# Altium PCB PCB.PcbDoc (part 2 of 2)
Units mm, origin at the board's own origin, x right, y up, seen from the top; angles counter-clockwise.
Board outline 44.8 x 23.3 mm, 4 copper layers (Top Layer, GND, VDD, Bottom Layer), stack 1.192 mm thick; 40 components, 63 nets, 241 pads, 86 vias.
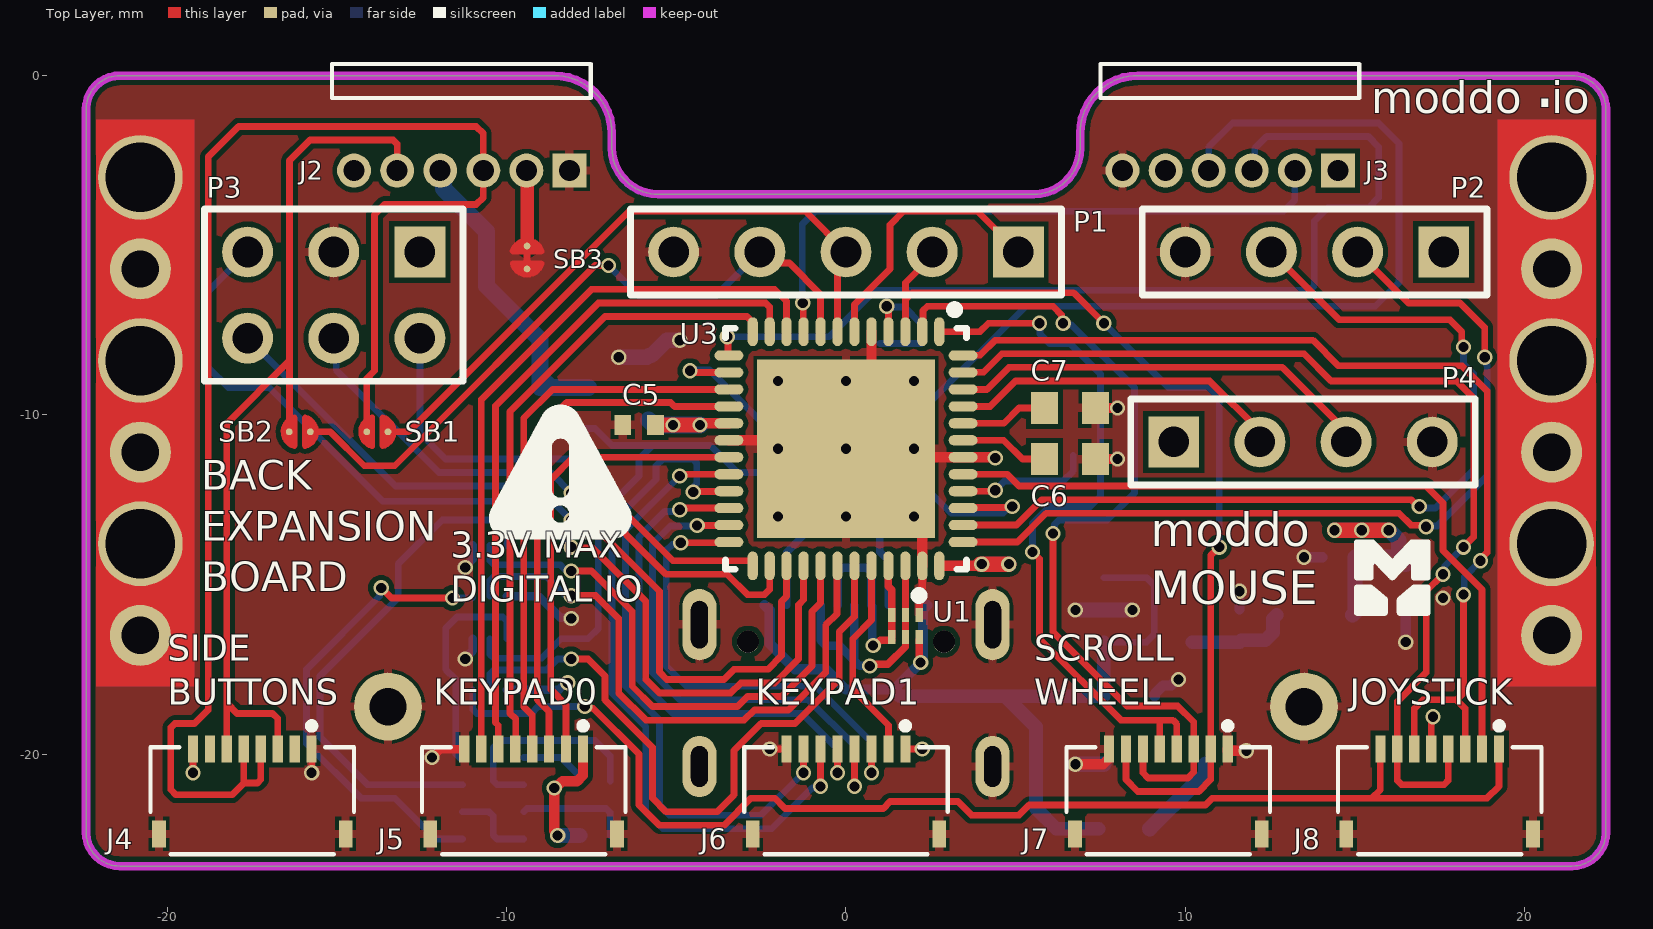
[diagram p0: Top Layer view]

## Part data (continued)
U3: "MCU 32-Bit SAM D21 ARM Cortex M0+ RISC 256KB Flash 3.3V 48-Pin QFN EP - Trays", Ambient Temperature Range High=85°C, Case/Package=QFN, Clock Frequency=48MHz, Manufacturer=Microchip, Manufacturer Lifecycle Status=REL, Max Junction Temperature (Tj)=100°C, Max Supply Voltage=3.63V, Min Operating Temperature=-40°C, Min Supply Voltage=1.62V, Operating Supply Voltage=3.3V, Category=Microcontrollers, ComponentLink1Description=https://datasheet.octopart.com:443/ATSAMD21G18A-MU-Microchip-datasheet-141002421.pdf?src-supplier=Geoflip, ComponentLink1URL=https://datasheet.octopart.com:443/ATSAMD21G18A-MU-Microchip-datasheet-141002421.pdf?src-supplier=Geoflip, ComponentLink2Description=https://sigma.octopart.com:443/141002422/technical_drawing/Microchip-ATSAMD21G18A-MU.pdf?src-supplier=Upverter, ComponentLink2URL=https://sigma.octopart.com:443/141002422/technical_drawing/Microchip-ATSAMD21G18A-MU.pdf?src-supplier=Upverter, ComponentLink3Description=https://datasheet.octopart.com:443/ATSAMD21G18A-MU-Atmel-datasheet-48569826.pdf?src-supplier=Upverter, ComponentLink3URL=https://datasheet.octopart.com:443/ATSAMD21G18A-MU-Atmel-datasheet-48569826.pdf?src-supplier=Upverter, ComponentLink4Description=https://datasheet.octopart.com:443/ATSAMD21G18A-MU-Microchip-datasheet-189045283.pdf?src-supplier=Microchip, ComponentLink4URL=https://datasheet.octopart.com:443/ATSAMD21G18A-MU-Microchip-datasheet-189045283.pdf?src-supplier=Microchip, ComponentLink5Description=https://datasheet.octopart.com:443/ATSAMD21G18A-MU-Microchip-datasheet-156012854.pdf?src-supplier=Microchip, ComponentLink5URL=https://datasheet.octopart.com:443/ATSAMD21G18A-MU-Microchip-datasheet-156012854.pdf?src-supplier=Microchip, ComponentLink6Description=https://datasheet.octopart.com:443/ATSAMD21G18A-MU-Microchip-datasheet-62316227.pdf?src-supplier=element14+APAC, ComponentLink6URL=https://datasheet.octopart.com:443/ATSAMD21G18A-MU-Microchip-datasheet-62316227.pdf?src-supplier=element14+APAC, ComponentLink7Description=https://datasheet.octopart.com:443/ATSAMD21G18A-MU-Atmel-datasheet-24968745.pdf?src-supplier=Farnell, ComponentLink7URL=https://datasheet.octopart.com:443/ATSAMD21G18A-MU-Atmel-datasheet-24968745.pdf?src-supplier=Farnell, ComponentLink8Description=https://datasheet.octopart.com:443/ATSAMD21G18A-MU-Microchip-datasheet-68295849.pdf?src-supplier=Electro+Sonic, ComponentLink8URL=https://datasheet.octopart.com:443/ATSAMD21G18A-MU-Microchip-datasheet-68295849.pdf?src-supplier=Electro+Sonic, ComponentLink9Description=https://datasheet.octopart.com:443/ATSAMD21G18A-MU-Microchip-datasheet-149521954.pdf?src-supplier=Microchip+SCT, ComponentLink9URL=https://datasheet.octopart.com:443/ATSAMD21G18A-MU-Microchip-datasheet-149521954.pdf?src-supplier=Microchip+SCT, ComponentLink10Description=https://datasheet.octopart.com:443/ATSAMD21G18A-MU-Microchip-datasheet-117009984.pdf?src-supplier=Future+Electronics, ComponentLink10URL=https://datasheet.octopart.com:443/ATSAMD21G18A-MU-Microchip-datasheet-117009984.pdf?src-supplier=Future+Electronics, ComponentLink11Description=https://datasheet.octopart.com:443/ATSAMD21G18A-MU-Microchip-datasheet-104525177.pdf?src-supplier=Future+Electronics, ComponentLink11URL=https://datasheet.octopart.com:443/ATSAMD21G18A-MU-Microchip-datasheet-104525177.pdf?src-supplier=Future+Electronics, ComponentLink12Description=https://datasheet.octopart.com:443/ATSAMD21G18A-MU-Microchip-datasheet-76796291.pdf?src-supplier=Future+Electronics, ComponentLink12URL=https://datasheet.octopart.com:443/ATSAMD21G18A-MU-Microchip-datasheet-76796291.pdf?src-supplier=Future+Electronics, ComponentLink13Description=https://datasheet.octopart.com:443/ATSAMD21G18A-MU-Microchip-datasheet-82525385.pdf?src-supplier=SHENGYU+ELECTRONICS, ComponentLink13URL=https://datasheet.octopart.com:443/ATSAMD21G18A-MU-Microchip-datasheet-82525385.pdf?src-supplier=SHENGYU+ELECTRONICS, ComponentLink14Description=https://datasheet.octopart.com:443/ATSAMD21G18A-MU-Microchip-datasheet-81455526.pdf?src-supplier=TME, ComponentLink14URL=https://datasheet.octopart.com:443/ATSAMD21G18A-MU-Microchip-datasheet-81455526.pdf?src-supplier=TME, ComponentLink15Description=http://sigma.octopart.com:80/188450237/materials_sheet/Microchip-ATSAMD21G18A-MU.pdf?src-supplier=Compliance+Statements, ComponentLink15URL=http://sigma.octopart.com:80/188450237/materials_sheet/Microchip-ATSAMD21G18A-MU.pdf?src-supplier=Compliance+Statements, ComponentLink16Description=http://sigma.octopart.com:80/rohs_statement/Microchip-company-71.pdf?src-supplier=Compliance+Statements, ComponentLink16URL=http://sigma.octopart.com:80/rohs_statement/Microchip-company-71.pdf?src-supplier=Compliance+Statements, ComponentLink17Description=http://sigma.octopart.com:80/reach_statement/Microchip-company-70.pdf?src-supplier=Compliance+Statements, ComponentLink17URL=http://sigma.octopart.com:80/reach_statement/Microchip-company-70.pdf?src-supplier=Compliance+Statements, ComponentLink18Description=http://sigma.octopart.com:80/conflict_mineral_statement/Microchip-company-69.pdf?src-supplier=Compliance+Statements, ComponentLink18URL=http://sigma.octopart.com:80/conflict_mineral_statement/Microchip-company-69.pdf?src-supplier=Compliance+Statements, ComponentLink19Description=http://sigma.octopart.com:80/conflict_mineral_statement/Microchip-company-68.pdf?src-supplier=Compliance+Statements, ComponentLink19URL=http://sigma.octopart.com:80/conflict_mineral_statement/Microchip-company-68.pdf?src-supplier=Compliance+Statements, ComponentLink20Description=http://sigma.octopart.com:80/reach_statement/Atmel-company-6.pdf?src-supplier=Compliance+Statements, ComponentLink20URL=http://sigma.octopart.com:80/reach_statement/Atmel-company-6.pdf?src-supplier=Compliance+Statements, ComponentLink21Description=http://sigma.octopart.com:80/rohs_statement/Atmel-company-5.pdf?src-supplier=Compliance+Statements, ComponentLink21URL=http://sigma.octopart.com:80/rohs_statement/Atmel-company-5.pdf?src-supplier=Compliance+Statements, ComponentLink22Description=http://sigma.octopart.com:80/rohs_statement/Atmel-company-4.pdf?src-supplier=Compliance+Statements, ComponentLink22URL=http://sigma.octopart.com:80/rohs_statement/Atmel-company-4.pdf?src-supplier=Compliance+Statements, Contact Plating=Tin, Core Architecture=ARM, Country of Assembly="Philippines, Taiwan, Thailand", Country of Fabrication=Taiwan, Country of Origin="Philippines, Taiwan, Thailand", Data Bus Width=32b, Export Control Classification Number (ECCN) Code=3A991.a.2, Frequency=48MHz, Harmonized Tariff Schedule (HTS) Code=8542.31.0025, Height=900µm, HS Code=8542.31.0025, Interface=I2C, Lifecycle Status=Production, Manufacturer Part Number=ATSAMD21G18A-MU, Max Operating Temperature=85°C, Memory Format=FLASH, Memory Size=256KB, Memory Type=FLASH, Mounting Technology="Surface Mount", Number of A/D Converters=1, Number of ADC Channels=14, Number of I2C Channels=6, Number of I/Os=38, Number of Programmable I/O=38, Number of PWM Channels=20, Number of SPI Channels=6, Number of Timers/Counters=8, Number of UART Channels=6, Number of USB Channels=1, Oscillator Type=Internal, Packaging=Tray, Peripherals="Brown-out Detect/Reset", Pins=48, Pricing="1=4.19, 10=4.01, 25=3.81, 50=3.64, 100=3.45 (USD)", Projected EOL Date=2039-11-29, RAM Size=32kB, REACH SVHC=No, RoHS=Compliant, Schedule B="8542310000, 8542310000|8542310000|8542310000|8542310000|8542310000", Stock=403, Supplier=Newark, Supplier Part Number=ATSAMD21G18A-MU, Watchdog Timer=Yes

## Free pads (board coordinates)
  round 1.8 hole 1.1: ""(-20.8,-16.5) ""(-20.8,-11.1) ""(-20.8,-5.7) ""(20.8,-16.5) ""(20.8,-11.1) ""(20.8,-5.7)
  round 2.5 hole 2.05: ""(-20.8,-13.8) ""(-20.8,-8.4) ""(-20.8,-3) ""(20.8,-13.8) ""(20.8,-8.4) ""(20.8,-3)
  round 2 hole 1.1: ""(-13.5,-18.6) ""(13.5,-18.6)

## Via types
v1: diameter 0.45, hole 0.3, Top Layer to Bottom Layer, tented both sides, 77 vias
v2: diameter 0.6, hole 0.3, Top Layer to Bottom Layer, tented both sides, 9 vias

## Nets (pads, with @x,y where several pads share a name; then routed paths per layer and width w, separated by ;. In a path a pad name is that pad's centre, name@x,y a point inside that pad or via, vN(x,y) a via of type N, cw(c..) or ccw(c..) an arc to the next point about the centre after c; other vN are vias at no path point)
3V0: C2.2 D1.2 U2.5 | length 3.1
  Bottom Layer w0.4: U2.5 C2.2 11.65,-16.65 12.351,-16.65 12.585,-16.416 12.585,-16.015 D1.2
BACK_DETECT: J2.2 SB3.2 | length 2.2
  Top Layer w0.4: J2.2 -9.4,-2.82 SB3.2
BACK_GPIO: J3.5
BUTTON: J3.1
BUTTON_RST: SW1.1 U3.40 | length 3.9
  Top Layer w0.2: U3.40 4.375,-12.25 v1(4.4,-12.225)
  Bottom Layer w0.2: v1(4.4,-12.225) 4.675,-11.95 6.4,-11.95 6.7,-11.65 SW1.1
CC1: J1.A5 R2.2 | length 2.4
  Bottom Layer w0.22: R2.2 1,-14.038 1.25,-14.287 J1.A5
CC2: J1.B5 R1.2 | length 2.6
  Bottom Layer w0.22: J1.B5 -1.75,-14.05 -1.165,-13.465 -1.165,-13.44 -1.025,-13.3 R1.2
CLICK_BACKWARD: J2.5 J4.3 J4.6 SB2.2 | length 27.1
  Top Layer w0.2: J4.6 -18.25,-18.5 ; J4.3 -16.75,-18.95 -16.9,-18.8 -17.95,-18.8 -18.25,-18.5 ; SB2.2 -16.4,-10.488 -16.4,-10.138 -16.4,-8.4 ; J2.5 -13.23,-2.017 -13.347,-1.9 -15.8,-1.9 -16.4,-2.5 -16.4,-8.4 ; -18.25,-18.5 -18.25,-10.25 -16.4,-8.4
CLICK_FORWARD: J2.3 J4.4 J4.5 SB1.2 | length 44.6
  Top Layer w0.2: J4.5 -17.75,-20.85 ; J4.4 -17.25,-20.75 -17.35,-20.85 -17.75,-20.85 ; SB1.2 -14.125,-10.147 -14.125,-8.925 -13.9,-8.7 -13.9,-4.1 -13.6,-3.8 -10.9,-3.8 -10.69,-3.59 J2.3 -10.69,-1.71 -10.9,-1.5 -17.9,-1.5 -18.8,-2.4 -18.8,-18.7 -19.2,-19.1 -19.783,-19.1 -19.9,-19.217 -19.9,-21.05 -19.75,-21.2 -18.1,-21.2 -17.75,-20.85
D0: J7.4 J7.5 U3.1 | length 21.7
  Top Layer w0.2: U3.1 3.95,-7.55 4.2,-7.3 v1(5.7,-7.3) ; v1(5.5,-14.042) 5.7,-14.242 5.7,-16.6 8.1,-19 9.25,-19 ; J7.5 9.25,-19 ; J7.4 9.75,-19.117 9.633,-19 9.25,-19
  Bottom Layer w0.2: v1(5.5,-14.042) 5.5,-13.2 6,-12.7 7.2,-12.7 7.5,-12.4 7.5,-8.8 6.6,-7.9 6,-7.9 5.721,-7.621 5.721,-7.321 v1(5.7,-7.3)
D1: J7.3 J7.6 U3.2 | length 26.1
  Top Layer w0.2: U3.2 2.269,-7.531 2.269,-6.931 2.4,-6.8 6.1,-6.8 6.352,-7.052 6.352,-7.252 v1(6.4,-7.3) ; v1(6.1,-13.5) 6.1,-16.4 8.281,-18.581 9.776,-18.581 10.25,-19.055 J7.3 10.25,-20.533 10.083,-20.7 8.9,-20.7 8.75,-20.55 J7.6
  Bottom Layer w0.2: v1(6.1,-13.5) 6.148,-13.452 6.148,-13.229 6.277,-13.1 7.7,-13.1 8.5,-12.3 8.5,-9.2 6.648,-7.348 6.448,-7.348 v1(6.4,-7.3)
D2/A0/DAC0: J7.2 J7.7 P1.2 U3.3 | length 28.3
  Top Layer w0.2: U3.3 1.75,-6.107 2.54,-5.317 P1.2 ; 1.75,-6.6 1.95,-6.4 6.7,-6.4 v1(7.6,-7.3) ; J7.7 8.25,-20.75 8.6,-21.1 10.4,-21.1 10.75,-20.75 J7.2 10.75,-14.15 v1(11,-13.9)
  Bottom Layer w0.2: v1(7.6,-7.3) 9.5,-9.2 10.7,-9.2 11,-9.5 v1(11,-13.9)
D3/A1: P1.3 SB1.1 U3.7 | length 19.1
  Top Layer w0.2: SB1.1 -13.325,-10.5 -12.9,-10.5 -6.4,-4 -1.2,-4 P1.3 0,-5.525 -0.25,-5.775 U3.7
D4/A2: P1.4 SB2.1 U3.8 | length 20.4
  Top Layer w0.2: SB2.1 -15.613,-10.5 -15.2,-10.5 -14.2,-11.5 -13.3,-11.5 -7.4,-5.6 v1(-7,-5.6) ; P1.4 -2.215,-5.2 -1.887,-5.529 -1.671,-5.529 -0.75,-6.45 U3.8
  Bottom Layer w0.2: v1(-7,-5.6) -6.1,-6.5 -3.84,-6.5 P1.4
D5/A3: J3.2 U3.9 | length 18.9
  Top Layer w0.2: v1(-1.275,-6.7) -1.262,-6.712 -1.262,-7.538 U3.9
  Bottom Layer w0.2: v1(-1.275,-6.7) -1.291,-6.684 -1.291,-4.391 -0.9,-4 12.9,-4 13.23,-3.67 J3.2
D6/A4: J5.7 U3.10 | length 21.7
  Top Layer w0.2: J5.7 -10.75,-19.245 -10.75,-9.55 -7.5,-6.3 -2.1,-6.3 -1.75,-6.65 U3.10
D7/A5: J5.6 U3.11 | length 20.3
  Top Layer w0.2: J5.6 -10.25,-19.15 -10.334,-19.066 -10.334,-9.734 -7.3,-6.7 -2.367,-6.7 -2.25,-6.817 U3.11
D8/A6: J5.5 U3.12 | length 18.7
  Top Layer w0.2: J5.5 -9.733,-19.833 -9.733,-18.967 -9.9,-18.8 -9.9,-9.9 -7.1,-7.1 -2.917,-7.1 -2.75,-7.267 U3.12
D9/SDA: J3.3 U3.13 | length 28.7
  Top Layer w0.2: v1(-3.5,-7.7) -3.475,-7.725 -3.475,-8.225 U3.13
  Bottom Layer w0.2: v1(-3.5,-7.7) -0.5,-7.7 0.875,-6.325 13.675,-6.325 13.8,-6.2 13.8,-4.3 14.2,-3.9 15.4,-3.9 15.7,-3.6 15.7,-2.1 15.4,-1.8 12.4,-1.8 12.046,-2.154 12.046,-2.714 J3.3
D10/SCL: J3.4 U3.14 | length 35.4
  Top Layer w0.2: v1(-4.6,-8.7) -4.559,-8.7 -4.509,-8.75 U3.14
  Bottom Layer w0.2: v1(-4.6,-8.7) -4.579,-8.679 -4.021,-8.679 -2.5,-10.2 1.9,-10.2 5.3,-6.8 15.6,-6.8 16.3,-6.1 16.3,-2 15.7,-1.4 11.4,-1.4 10.69,-2.11 J3.4
D11: J5.4 U3.15 | length 16.3
  Top Layer w0.2: J5.4 -9.25,-18.85 -9.5,-18.6 -9.5,-10.1 -8.65,-9.25 U3.15
D12: J5.3 U3.16 | length 15.6
  Top Layer w0.2: J5.3 -8.75,-18.75 -9.1,-18.4 -9.1,-10.5 -8.233,-9.633 -5.167,-9.633 -5.05,-9.75 U3.16
D13: J5.2 U3.19 | length 13.7
  Top Layer w0.2: J5.2 -8.25,-18.55 -8.7,-18.1 -8.7,-11.9 -8.05,-11.25 U3.19
D14: J6.7 U3.20 | length 17.8
  Top Layer w0.2: v1(-4.9,-11.8) -4.852,-11.752 -4.675,-11.752 -4.673,-11.75 U3.20 ; v1(-1.25,-20.55) J6.7
  Bottom Layer w0.2: v1(-4.9,-11.8) -6.5,-13.4 -6.5,-18 -5.5,-19 -5.5,-21.5 -5.2,-21.8 -2.5,-21.8 v1(-1.25,-20.55)
D15: J6.6 U3.21 | length 21.4
  Top Layer w0.2: v1(-4.5,-12.275) -4.488,-12.263 -3.463,-12.263 U3.21 ; v1(-0.75,-20.95) J6.6
  Bottom Layer w0.2: v1(-4.5,-12.275) -4.452,-12.227 -4.452,-12.085 -4.4,-12.033 -4.4,-11.417 -4.517,-11.3 -5.4,-11.3 -5.6,-11.5 -5.6,-11.9 -6.9,-13.2 -6.9,-18.2 -5.9,-19.2 -5.9,-21.7 -5.4,-22.2 -2.2,-22.2 -0.998,-20.998 -0.798,-20.998 v1(-0.75,-20.95)
D16: J6.5 U3.22 | length 15.3
  Top Layer w0.2: v1(-4.9,-12.8) -4.832,-12.8 -4.782,-12.75 U3.22 ; v1(-0.25,-20.55) J6.5
  Bottom Layer w0.2: v1(-4.9,-12.8) -4.948,-12.848 -5.348,-12.848 -6.1,-13.6 -6.1,-17.8 -5.1,-18.8 -1.3,-18.8 -0.25,-19.85 v1(-0.25,-20.55)
D17: J6.4 U3.23 | length 15.4
  Top Layer w0.2: v1(-4.387,-13.263) -3.463,-13.263 U3.23 ; v1(0.25,-20.95) J6.4
  Bottom Layer w0.2: v1(-4.387,-13.263) -4.4,-13.275 -5.175,-13.275 -5.7,-13.8 -5.7,-17.6 -4.9,-18.4 -1.1,-18.4 0.25,-19.75 v1(0.25,-20.95)
D18: J6.3 U3.24 | length 13.9
  Top Layer w0.2: v1(-4.869,-13.769) -3.469,-13.769 U3.24 ; v1(0.75,-20.55) J6.3
  Bottom Layer w0.2: v1(-4.869,-13.769) -4.917,-13.817 -5.117,-13.817 -5.3,-14 -5.3,-17.4 -4.7,-18 -0.9,-18 0.75,-19.65 v1(0.75,-20.55)
D19/MOSI: P3.2 U3.25 | length 14.3
  Top Layer w0.2: v1(-7.7,-11.8) -7.632,-11.8 -7.511,-11.921 -7.479,-11.921 -5.1,-14.3 -2.796,-14.3 -2.75,-14.346 U3.25
  Bottom Layer w0.2: P3.2 -12.56,-10.54 -11.8,-11.3 -8.2,-11.3 v1(-7.7,-11.8)
D20/SCK: P3.4 U3.26 | length 17.2
  Top Layer w0.2: v1(-8.1,-12.3) -8.052,-12.348 -7.652,-12.348 -5.3,-14.7 -3.5,-14.7 -2.9,-15.3 -2.4,-15.3 -2.25,-15.15 U3.26
  Bottom Layer w0.2: P3.4 -15.027,-7.813 -15.027,-8.673 -12,-11.7 -8.7,-11.7 v1(-8.1,-12.3)
D21/CS: P3.6 U3.27 | length 24.3
  Top Layer w0.2: v1(-8.1,-13.1) -8.075,-13.125 -7.575,-13.125 -5.5,-15.2 -5.5,-17.583 -5.283,-17.8 -3.6,-17.8 -3.3,-17.5 -2.3,-17.5 -1.9,-17.1 -1.9,-15.5 -1.75,-15.35 U3.27
  Bottom Layer w0.2: P3.6 -13.28,-12.1 -9.1,-12.1 v1(-8.1,-13.1)
D22/MISO: P3.5 U3.28 | length 29.8
  Top Layer w0.2: v1(-8.1,-13.9) -8.075,-13.925 -7.475,-13.925 -5.9,-15.5 -5.9,-17.8 -5.5,-18.2 -3.4,-18.2 -3.1,-17.9 -2.1,-17.9 -1.4,-17.2 -1.4,-15.6 -1.25,-15.45 U3.28
  Bottom Layer w0.2: P3.5 -18.8,-6.36 -18.8,-8.6 -18.2,-9.2 -17,-9.2 -13.65,-12.55 -9.45,-12.55 v1(-8.1,-13.9)
D23/LED_R: Q1.5 U3.29 | length 16.6
  Top Layer w0.2: v1(-8.1,-14.6) -7.5,-14.6 -6.3,-15.8 -6.3,-18 -5.7,-18.6 -3.2,-18.6 -2.9,-18.3 -1.9,-18.3 -1,-17.4 -1,-15.8 -0.75,-15.55 U3.29
  Bottom Layer w0.2: Q1.5 -10.5,-14.3 -10.383,-14.417 -8.425,-14.417 -8.29,-14.552 -8.148,-14.552 v1(-8.1,-14.6)
D24/LED_G: Q1.2 U3.30 | length 17.3
  Top Layer w0.2: v1(-8.096,-15.33) -8.086,-15.321 -7.379,-15.321 -6.7,-16 -6.7,-18.2 -5.9,-19 -3,-19 -2.7,-18.7 -1.7,-18.7 -0.6,-17.6 -0.6,-16.2 -0.269,-15.869 -0.269,-14.469 U3.30
  Bottom Layer w0.2: Q1.2 -10.5,-14.884 -10.383,-14.767 -8.833,-14.767 -8.317,-15.283 -8.143,-15.283 v1(-8.096,-15.33)
D25/LED_B: Q2.5 U3.31 | length 20
  Top Layer w0.2: v1(-8.1,-17.2) -7.6,-17.2 -7.1,-17.7 -7.1,-18.4 -5.7,-19.8 -5.7,-21.3 -5.3,-21.7 -3.8,-21.7 -3.3,-21.2 -3.3,-19.9 -2.5,-19.1 -1.5,-19.1 -0.2,-17.8 -0.2,-16.4 0.25,-15.95 U3.31
  Bottom Layer w0.2: Q2.5 -10.5,-17.642 -10.383,-17.525 -8.825,-17.525 -8.5,-17.2 v1(-8.1,-17.2)
D26: J6.2 U3.32 | length 6.1
  Top Layer w0.2: U3.32 0.75,-16.05 0.2,-16.6 0.2,-18.1 1.25,-19.15 J6.2
D29/TX: P2.2 U3.37 | length 25.7
  Top Layer w0.2: U3.37 5.05,-13.75 5.9,-12.9 16.3,-12.9 16.652,-13.252 17.052,-13.252 v1(17.1,-13.3) ; P2.2 16.58,-6.7 18.1,-6.7 18.825,-7.425 v1(18.825,-8.3)
  Bottom Layer w0.2: v1(17.1,-13.3) 17.125,-13.275 17.425,-13.275 18.9,-11.8 18.9,-8.542 18.873,-8.515 18.873,-8.348 v1(18.825,-8.3)
D30/RX: P2.3 U3.38 | length 26.7
  Top Layer w0.2: U3.38 5.022,-13.25 5.772,-12.5 16.658,-12.5 16.858,-12.7 v1(16.9,-12.7) ; P2.3 14.54,-7.2 17.8,-7.2 18.152,-7.552 18.152,-7.952 v1(18.2,-8)
  Bottom Layer w0.2: v1(16.9,-12.7) 16.948,-12.748 17.377,-12.748 18.5,-11.625 18.5,-8.8 18.2,-8.5 v1(18.2,-8)
D31: Q2.2 R5.1 U3.39 | length 26.7
  Top Layer w0.2: U3.39 3.469,-12.731 4.869,-12.731 v1(4.9,-12.7)
  Bottom Layer w0.2: Q2.2 -10.5,-17.058 -10.383,-17.175 -8.975,-17.175 -8.4,-16.6 -7.6,-16.6 -7.3,-16.3 -7.3,-13 -6.1,-11.8 -6.1,-11.3 -5.7,-10.9 ; R5.1 -7.4,-10.4 -6.9,-10.9 -5.7,-10.9 ; v1(4.9,-12.7) 4.832,-12.7 4.632,-12.9 3.1,-12.9 1.9,-11.7 -3.2,-11.7 -4,-10.9 -5.7,-10.9
D32: J8.2 U3.41 | length 22.2
  Top Layer w0.2: U3.41 4.75,-11.75 5.1,-12.1 17.1,-12.1 17.6,-12.6 17.6,-14 18.75,-15.15 J8.2
D33/A7: J8.4 J8.7 U3.47 | length 30.6
  Top Layer w0.2: U3.47 3.456,-8.744 4.056,-8.744 4.6,-8.2 13.5,-8.2 14.3,-9 18,-9 18.5,-9.5 18.5,-13.6 v1(18.2,-13.9) ; v1(17.6,-14.7) 17.1,-15.2 17.1,-17.6 16.25,-18.45 J8.7 16.25,-20.783 16.367,-20.9 17.633,-20.9 17.75,-20.783 J8.4
  Bottom Layer w0.2: v1(17.6,-14.7) 17.648,-14.652 17.648,-14.452 v1(18.2,-13.9)
D34/A8: J8.3 J8.6 U3.48 | length 29.8
  Top Layer w0.2: U3.48 3.456,-8.244 3.956,-8.244 4.4,-7.8 13.759,-7.8 14.515,-8.556 18.156,-8.556 18.9,-9.3 18.9,-14.058 18.7,-14.258 v1(18.7,-14.3) ; J8.6 16.75,-18.65 17,-18.4 18,-18.4 ; v1(18.2,-15.3) 18.2,-18.2 18,-18.4 ; J8.3 18.25,-18.65 18,-18.4
  Bottom Layer w0.2: v1(18.2,-15.3) 18.225,-15.275 18.225,-14.775 v1(18.7,-14.3)
GND: C1.2 C2.1 C3.1 C4.2 C5.1 C6.2 C7.2 C8.2 C9.1 C10.1 J1.1 J1.2 J1.3 J1.4 J1.A1-B12 J1.B1-A12 J2.1 J3.6 J4.1 J4.8 J4.S1 J4.S2 J5.8 J5.S1 J5.S2 J6.8 J6.S1 J6.S2 J7.1 J7.8 J7.S1 J7.S2 J8.S1 J8.S2 P1.5 P2.4 P3.3 P4.4 pad. Q1.1 Q1.4 Q2.1 Q2.4 Q3.1 R1.1 R2.1 R3.1 R5.2 SB3.1 SW1.2 SW1.3 U1.1 U2.2 U3.5 U3.18 U3.35 U3.42 U3.49 | length 36.4
  Top Layer w0.2: v1(-19.25,-20.55) J4.8 ; v1(-15.75,-20.55) J4.1 ; v1(-2.25,-19.85) J6.8
  Top Layer w0.22: U1.1 2.154,-15.19 2.25,-15.094 U3.35
  Top Layer w0.25: v1(-12.2,-20.1) -11.95,-19.85 J5.8
  Top Layer w0.3: U3.18 -0.25,-10.75 v2(0,-11) ; U3.5 0.75,-10.25 v2(0,-11) ; U3.35 2.25,-13.25 v2(2,-13) U3.49@0.25,-11.25 ; v1(4.4,-11.275) 4.375,-11.25 U3.42 U3.49@0.25,-11.25 ; v1(6.76,-20.3) 7.574,-20.3 7.75,-20.124 J7.8 ; C6.2 v1(8,-11.3) ; C7.2 v1(8,-9.8) ; J7.1 11.25,-19.9 v1(11.8,-19.9) ; v2(0,-11) U3.49@0.25,-11.25
  Bottom Layer w0.25: v1(-11.225,-17.2) -11.225,-17.179 -11,-16.954 Q2.1 ; v1(-11.225,-14.5) -11.225,-14.479 -11,-14.254 Q1.4 ; Q2.4 -8.454,-18.1 -8.254,-17.9 v1(-8.2,-17.9) ; Q1.1 -9.05,-15.35 -8.424,-15.976 -8.124,-15.976 v1(-8.1,-16)
  Bottom Layer w0.3: C1.2 9.1,-18.225 9.35,-17.975 9.584,-17.975 9.759,-17.8 v1(9.8,-17.8) ; C2.1 v1(11.6,-15.2) ; v1(13.5,-14.2) C3.1 ; v1(16.5,-16.7) C4.2
  Bottom Layer w0.45: v1(-6.7,-8.3) -5.865,-8.3 Q3.1 -5.73,-8.25 -5.28,-7.8 v1(-4.9,-7.8) ; v1(6.76,-20.3) R3.1 ; v1(6.76,-15.75) U2.2 v1(8.44,-15.75)
  other v1: 17.6,-15.4
  other v2: -2,-13 0,-13 -2,-11 2,-11 -2,-9 0,-9 2,-9
GND_JOYSTICK: J8.1 J8.8 Q2.6 | length 37
  Top Layer w0.2: v1(-7.7,-18.6) -7.652,-18.648 -7.452,-18.648 -6.1,-20 -6.1,-21.5 -5.5,-22.1 -3.6,-22.1 -2.8,-21.3 -2.1,-21.3 -1.8,-21.6 1.1,-21.6 1.3,-21.4 3.3,-21.4 3.7,-21.8 5.1,-21.8 5.4,-21.5 10.6,-21.5 10.8,-21.3 15.5,-21.3 ; J8.8 15.75,-21.05 15.5,-21.3 ; J8.1 19.25,-20.95 18.9,-21.3 15.5,-21.3
  Bottom Layer w0.2: Q2.6 -11,-18.683 -10.883,-18.8 -9.275,-18.8 -9.075,-18.6 v1(-7.7,-18.6)
LED_D_B: Q2.3 R4.4 | length 6.6
  Bottom Layer w0.2: R4.4 -11.4,-20.1 -11.5,-20 -11.5,-17.8 -11.8,-17.5 -11.8,-16.3 -11.462,-15.962 -10.117,-15.962 -10,-16.079 Q2.3
LED_D_G: Q1.6 R4.3 | length 15.3
  Bottom Layer w0.2: R4.3 -14.1,-20.9 -15.5,-19.5 -15.5,-17.7 -13.2,-15.4 -13.2,-14.4 -11.9,-13.1 -10.3,-13.1 -10.283,-13.083 -10.117,-13.083 -10,-13.2 Q1.6
LED_D_R: Q1.3 R4.1 | length 14.1
  Top Layer w0.2: v1(-13.7,-15.1) -13.4,-15.4 v1(-11.6,-15.4)
  Bottom Layer w0.2: v1(-13.7,-15.1) -13.748,-15.148 -13.748,-15.348 -15.9,-17.5 -15.9,-19.695 -14.295,-21.3 -13.3,-21.3 -12.1,-22.5 R4.1 ; v1(-11.6,-15.4) -11.025,-15.4 -11,-15.375 Q1.3
NetC6_1: C6.1 U3.43 | length 2.6
  Top Layer w0.2: U3.43 4.65,-10.75 5.2,-11.3 C6.1
NetC7_1: C7.1 U3.44 | length 2.6
  Top Layer w0.2: U3.44 4.65,-10.25 5.1,-9.8 C7.1
NetC8_1: C8.1 C9.2 U3.4 | length 3.8
  Top Layer w0.2: v1(1.2,-6.8) 1.2,-6.868 1.25,-6.918 U3.4
  Bottom Layer w0.2: C8.1 C9.2 2.2,-7.88 2.2,-7.3 1.725,-6.825 1.225,-6.825 v1(1.2,-6.8)
NetD2_1: D2.1 R3.2 | length 2.6
  Bottom Layer w0.45: D2.1 10.275,-20.875 10.325,-20.875 10.6,-20.6 R3.2
NetLED1_1: LED1.1 R4.6 | length 6.4
  Bottom Layer w0.2: R4.6 -10.283,-20.9 -10.4,-20.783 -10.4,-19.817 -10.183,-19.6 -7.4,-19.6 -6.95,-20.05 LED1.1
NetLED1_2: LED1.2 R4.5 | length 2
  Bottom Layer w0.2: R4.5 -8.4,-20.1 -7.85,-20.65 LED1.2
NetLED1_4: LED1.4 R4.7 | length 3.3
  Bottom Layer w0.2: R4.7 -9.4,-21.6 -7.067,-21.6 -6.95,-21.717 LED1.4
NetR4_2: R4.2 R4.8 | length 2.5
  Bottom Layer w0.2: R4.2 -10.517,-21.7 -10.4,-21.817 -10.4,-22.383 -10.283,-22.5 R4.8
SWCLK: P4.2 U3.45 | length 10
  Top Layer w0.2: U3.45 4.25,-9.75 5,-9 10.72,-9 12.2,-10.48 P4.2
SWDIO: P4.3 U3.46 | length 12.7
  Top Layer w0.2: U3.46 4.15,-9.25 4.8,-8.6 12.86,-8.6 14.74,-10.48 P4.3
USB_D_N: J1.A7 J1.B7 U1.3 U1.4 U3.33 | length 7
  Top Layer w0.22: v1(0.8,-16.8) 0.862,-16.8 1.012,-16.65 U1.4@1.354,-16.65 ; U3.33 1.25,-15.05 1.354,-15.154 U1.3 U1.4
  Bottom Layer w0.25: J1.A7 -0.25,-14.646 -0.104,-14.5 0.6,-14.5 0.75,-14.65 J1.B7 0.775,-15.635 0.775,-16.775 v1(0.8,-16.8)
USB_D_P: J1.A6 J1.B6 U1.2 U1.5 U3.34 | length 8.1
  Top Layer w0.22: v1(0.7,-17.4) 0.744,-17.356 1.236,-17.356 1.754,-16.838 U1.5 U1.2 U3.34@1.754,-14.454
  Bottom Layer w0.25: J1.B6 -0.75,-16.65 -0.6,-16.8 -0.2,-16.8 0.25,-17.25 ; J1.A6 0.25,-17.25 ; v1(0.7,-17.4) 0.4,-17.4 0.25,-17.25
VBUS: J2.6
VDD: C3.2 C4.1 C5.2 D1.1 J5.1 J6.1 J8.5 LED1.3 P1.1 P2.1 P3.1 P4.1 Q3.2 U3.6 U3.17 U3.36 | length 30.9
  Top Layer w0.2: U3.6 0.25,-6.75 1.3,-5.7 1.3,-4.4 1.7,-4 3.88,-4 P1.1 ; J6.1 v1(2.25,-19.85) ; J8.5 17.25,-19.018 17.3,-18.968 v1(17.3,-18.9)
  Top Layer w0.3: v1(-8.5,-22.4) -8.5,-22.359 -8.6,-22.259 v1(-8.6,-21) -8.559,-21 -8.359,-20.8 -7.926,-20.8 -7.75,-20.624 J5.1 ; v1@-4.3,-10.25 U3.17 ; U3.36 3.909,-14.45 v1@3.959,-14.4
  Top Layer w0.45: C5.2 v1(-5.1,-10.3) v1(-4.3,-10.3) ; v1@3.959,-14.4 v1(4,-14.4) v1(4.8,-14.4) ; v1(14.4,-13.4) v1(15.2,-13.4) v1(16,-13.4)
  GND w0.45: v1(4,-14.4) v1(4.8,-14.4)
  GND w0.5: v1(-5.1,-10.3) v1(-4.3,-10.3)
  VDD w0.45: v1(14.4,-13.4) v1(15.2,-13.4) v1(16,-13.4)
  Bottom Layer w0.45: v1(-8.5,-22.4) LED1.3 ; v1(4,-14.4) v1(4.8,-14.4) ; v1(14.4,-13.4) v1(15.2,-13.4) v1(16,-13.4) 16.294,-13.694 16.294,-14.225 C4.1@16.469,-14.4 ; D1.1 15,-15.83 C3.2 16.225,-14.2 16.425,-14.4 C4.1@16.469,-14.4 ; C4.1 C4.1@16.469,-14.4
  Bottom Layer w0.5: Q3.2 -5.665,-10.3 v1(-5.1,-10.3) v1(-4.3,-10.3)
VDD_EXP: C10.2 J2.4 Q3.3 | length 9.4
  Bottom Layer w0.5: J2.4 -11.864,-2.896 -11.864,-3.336 -10.6,-4.6 -10.6,-6.2 -9.02,-7.78 -9.02,-8.88 ; C10.2 -9.02,-8.88 ; -9.02,-8.7 -9.02,-8.88 ; Q3.3 -8.7,-9.2 -9.02,-8.88
VUSB: C1.1 D2.2 J1.A4-B9 J1.B4-A9 U1.6 U2.1 U2.3 | length 27.3
  Top Layer w0.22: U1.6@2.154,-16.628 2.154,-16.854 2.156,-16.856 2.156,-17.256 v1(2.2,-17.3)
  Bottom Layer w0.2: U2.1 8.854,-16.7 9.089,-16.466 9.089,-15.034 8.854,-14.8 U2.3
  Bottom Layer w0.3: J1.B4-A9 -2.25,-15.76 -2.25,-16.75 -1.5,-17.5 -0.6,-17.5 0,-18.1 1.4,-18.1 v1(2.2,-17.3) 2.2,-17.259 2.265,-17.194 2.265,-15.745 J1.A4-B9
  Bottom Layer w0.4: 1.4,-18.1 1.6,-18.3 4.7,-18.3 ; D2.2 6.2,-22.2 5.6,-21.6 5.6,-19.2 4.7,-18.3 ; U2.1 C1.1 4.7,-18.3
pads on no net: J1. J1.A8 J1.B8 J4.2 J4.7 U2.4

## Polygon pours and split planes (outlines as drawn)
GND on GND "GND_L02_P000" (solid, pour order 0): -22.4,-22.3 ccw(c-21.4,-22.3) -21.4,-23.3 21.4,-23.3 ccw(c21.4,-22.3) 22.4,-22.3 22.4,-1 ccw(c21.4,-1) 21.4,0 8.6,0 8.607,0 ccw(c8.607,-1.708) 6.899,-1.708 6.899,-2.136 cw(c5.537,-2.136) 5.537,-3.499 5.5,-3.5 -5.5,-3.5 -5.537,-3.499 cw(c-5.537,-2.136) -6.899,-2.136 -6.899,-1.708 ccw(c-8.607,-1.708) -8.607,0 -8.6,0 -21.4,0 ccw(c-21.4,-1) -22.4,-1
VDD on VDD "VDD_L03_P001" (solid, pour order 1): -22.4,-22.3 ccw(c-21.4,-22.3) -21.4,-23.3 21.4,-23.3 ccw(c21.4,-22.3) 22.4,-22.3 22.4,-1 ccw(c21.4,-1) 21.4,0 8.6,0 8.607,0 ccw(c8.607,-1.708) 6.899,-1.708 6.899,-2.136 cw(c5.537,-2.136) 5.537,-3.499 5.5,-3.5 -5.5,-3.5 -5.537,-3.499 cw(c-5.537,-2.136) -6.899,-2.136 -6.899,-1.708 ccw(c-8.607,-1.708) -8.607,0 -8.6,0 -21.4,0 ccw(c-21.4,-1) -22.4,-1
GND on Top Layer "GND_L01_P002" (solid, pour order 2): -22.4,-22.3 ccw(c-21.4,-22.3) -21.4,-23.3 21.4,-23.3 ccw(c21.4,-22.3) 22.4,-22.3 22.4,-1 ccw(c21.4,-1) 21.4,0 8.6,0 8.607,0 ccw(c8.607,-1.708) 6.899,-1.708 6.899,-2.136 cw(c5.537,-2.136) 5.537,-3.499 5.5,-3.5 -5.5,-3.5 -5.537,-3.499 cw(c-5.537,-2.136) -6.899,-2.136 -6.899,-1.708 ccw(c-8.607,-1.708) -8.607,0 -8.6,0 -21.4,0 ccw(c-21.4,-1) -22.4,-1
GND on Bottom Layer "GND_L04_P003" (solid, pour order 3): -22.4,-22.3 ccw(c-21.4,-22.3) -21.4,-23.3 21.4,-23.3 ccw(c21.4,-22.3) 22.4,-22.3 22.4,-1 ccw(c21.4,-1) 21.4,0 8.6,0 8.607,0 ccw(c8.607,-1.708) 6.899,-1.708 6.899,-2.136 cw(c5.537,-2.136) 5.537,-3.499 5.5,-3.5 -5.5,-3.5 -5.537,-3.499 cw(c-5.537,-2.136) -6.899,-2.136 -6.899,-1.708 ccw(c-8.607,-1.708) -8.607,0 -8.6,0 -21.4,0 ccw(c-21.4,-1) -22.4,-1

## Keep-outs
Keep-Out Layer:
  lines w0.254: -8.607,0 cw(c-8.607,-1.708) -6.899,-1.708 -6.899,-2.136 ccw(c-5.537,-2.136) -5.537,-3.499 ; -8.6,0 -21.4,0 ccw(c-21.4,-1) -22.4,-1 -22.4,-22.3 ccw(c-21.4,-22.3) -21.4,-23.3 21.4,-23.3 ccw(c21.4,-22.3) 22.4,-22.3 22.4,-1 ccw(c21.4,-1) 21.4,0 8.6,0 ; -5.5,-3.5 5.5,-3.5 ; 5.537,-3.499 ccw(c5.537,-2.136) 6.899,-2.136 6.899,-1.708 cw(c8.607,-1.708) 8.607,0

## Other copper
Top Layer:
  rectangle net GND: -22.1,-18 -19.2,-1.3
  region net GND: 22.1,-1.3 19.2,-1.3 19.2,-18 22.1,-18
Bottom Layer:
  region net GND: 22.1,-1.3 19.2,-1.3 19.2,-18 22.1,-18
  rectangle net GND: -22.1,-18 -19.2,-1.3

## Silkscreen, mask and mechanical layers (free items; w line width, h text height)
Top Overlay:
  drawing of 4 lines, arcs and shapes, not listed
  text "moddo" at 15.489,-1.414 h1.6
  text "." at 20.289,-1.414 h2.5
  text "io" at 20.789,-1.414 h1.6
  text "BACK / EXPANSION / BOARD" at -19,-15.5 h1.5
  text "3.3V MAX / DIGITAL IO" at -11.65,-15.766 h1.3
  text "moddo / MOUSE" at 8.982,-15.904 h1.7
  text "SIDE / BUTTONS" at -19.995,-18.8 h1.3
  text "KEYPAD0" at -12.156,-18.8 h1.3
  text "KEYPAD1" at -2.656,-18.8 h1.3
  text "SCROLL / WHEEL" at 5.556,-18.8 h1.3
  text "JOYSTICK" at 14.844,-18.8 h1.3
Bottom Overlay:
  drawing of 7 lines, arcs and shapes, not listed
  text "io" at 16.5,-1.4 h1.6
  text "." at 17,-1.4 h2.5
  text "moddo" at 21.8,-1.4 h1.6
  text "1" at -14.3,-1.9 h1.2
  text "2" at -13,-1.9 h1.2
  text "3" at -11.7,-1.9 h1.2
  text "4" at -10.4,-1.9 h1.2
  text "5" at -9.2,-1.9 h1.2
  text "6" at -7.9,-1.9 h1.2
  text "7" at 8.4,-1.9 h1.2
  text "8" at 9.7,-1.9 h1.2
  text "9" at 10.9,-1.9 h1.2
  text "10" at 12.5,-1.9 h1.2
  text "11" at 13.8,-1.9 h1.2
  text "12" at 15.1,-1.9 h1.2
  text "GND" at -16.5,-2.686 h1.3
  text "MISO" at -16.3,-4.086 h1.3
  text "VDD" at -9.2,-5.6 h1.3
  text "GND" at -4,-7.086 h1.3
  text "A0" at 3.2,-7.086 h1.3
  text "GND" at 11,-7.086 h1.3
  text "A2" at -1.9,-7.1 h1.3
  text "A1" at 0.6,-7.1 h1.3
  text "VDD" at 6.2,-7.1 h1.3
  text "RX" at 13.1,-7.1 h1.3
  text "TX" at 15.7,-7.1 h1.3
  text "VDD" at 18.8,-7.1 h1.3
  text "MOSI" at -8.754,-8.097 h1.3
  text "CS" at -16.9,-9.686 h1.3
  text "SCK" at -14,-9.686 h1.3
  text "GND" at 18.5,-9.686 h1.3
  text "VDD" at 10.7,-9.7 h1.3
  text "SWD / CLK" at 13.294,-9.7 h1.3
  text "SWD / IO" at 15.994,-9.7 h1.3
  text "RESET" at 6.6,-13.586 h1.3
  text "USB FOR / PROGRAM / ONLY" at -4.9,-19.6 h1.1
  text "BACK / EXPANSION / BOARD" at 21.8,-21 h1.5
  text "moddo / MOUSE" at -13.382,-22.404 h1.7
  text "REV A" at 22.3,-22.6 h1.5